# Altium PCB Motor Driver.PcbDoc
Units mil, origin at the board's own origin, x right, y up, seen from the top; angles counter-clockwise.
Board outline 1620 x 1620 mil, 2 copper layers (Top Layer, Bottom Layer); 66 components, 61 nets, 246 pads, 97 vias.
Unrouted connection lines stored in the file: 11.
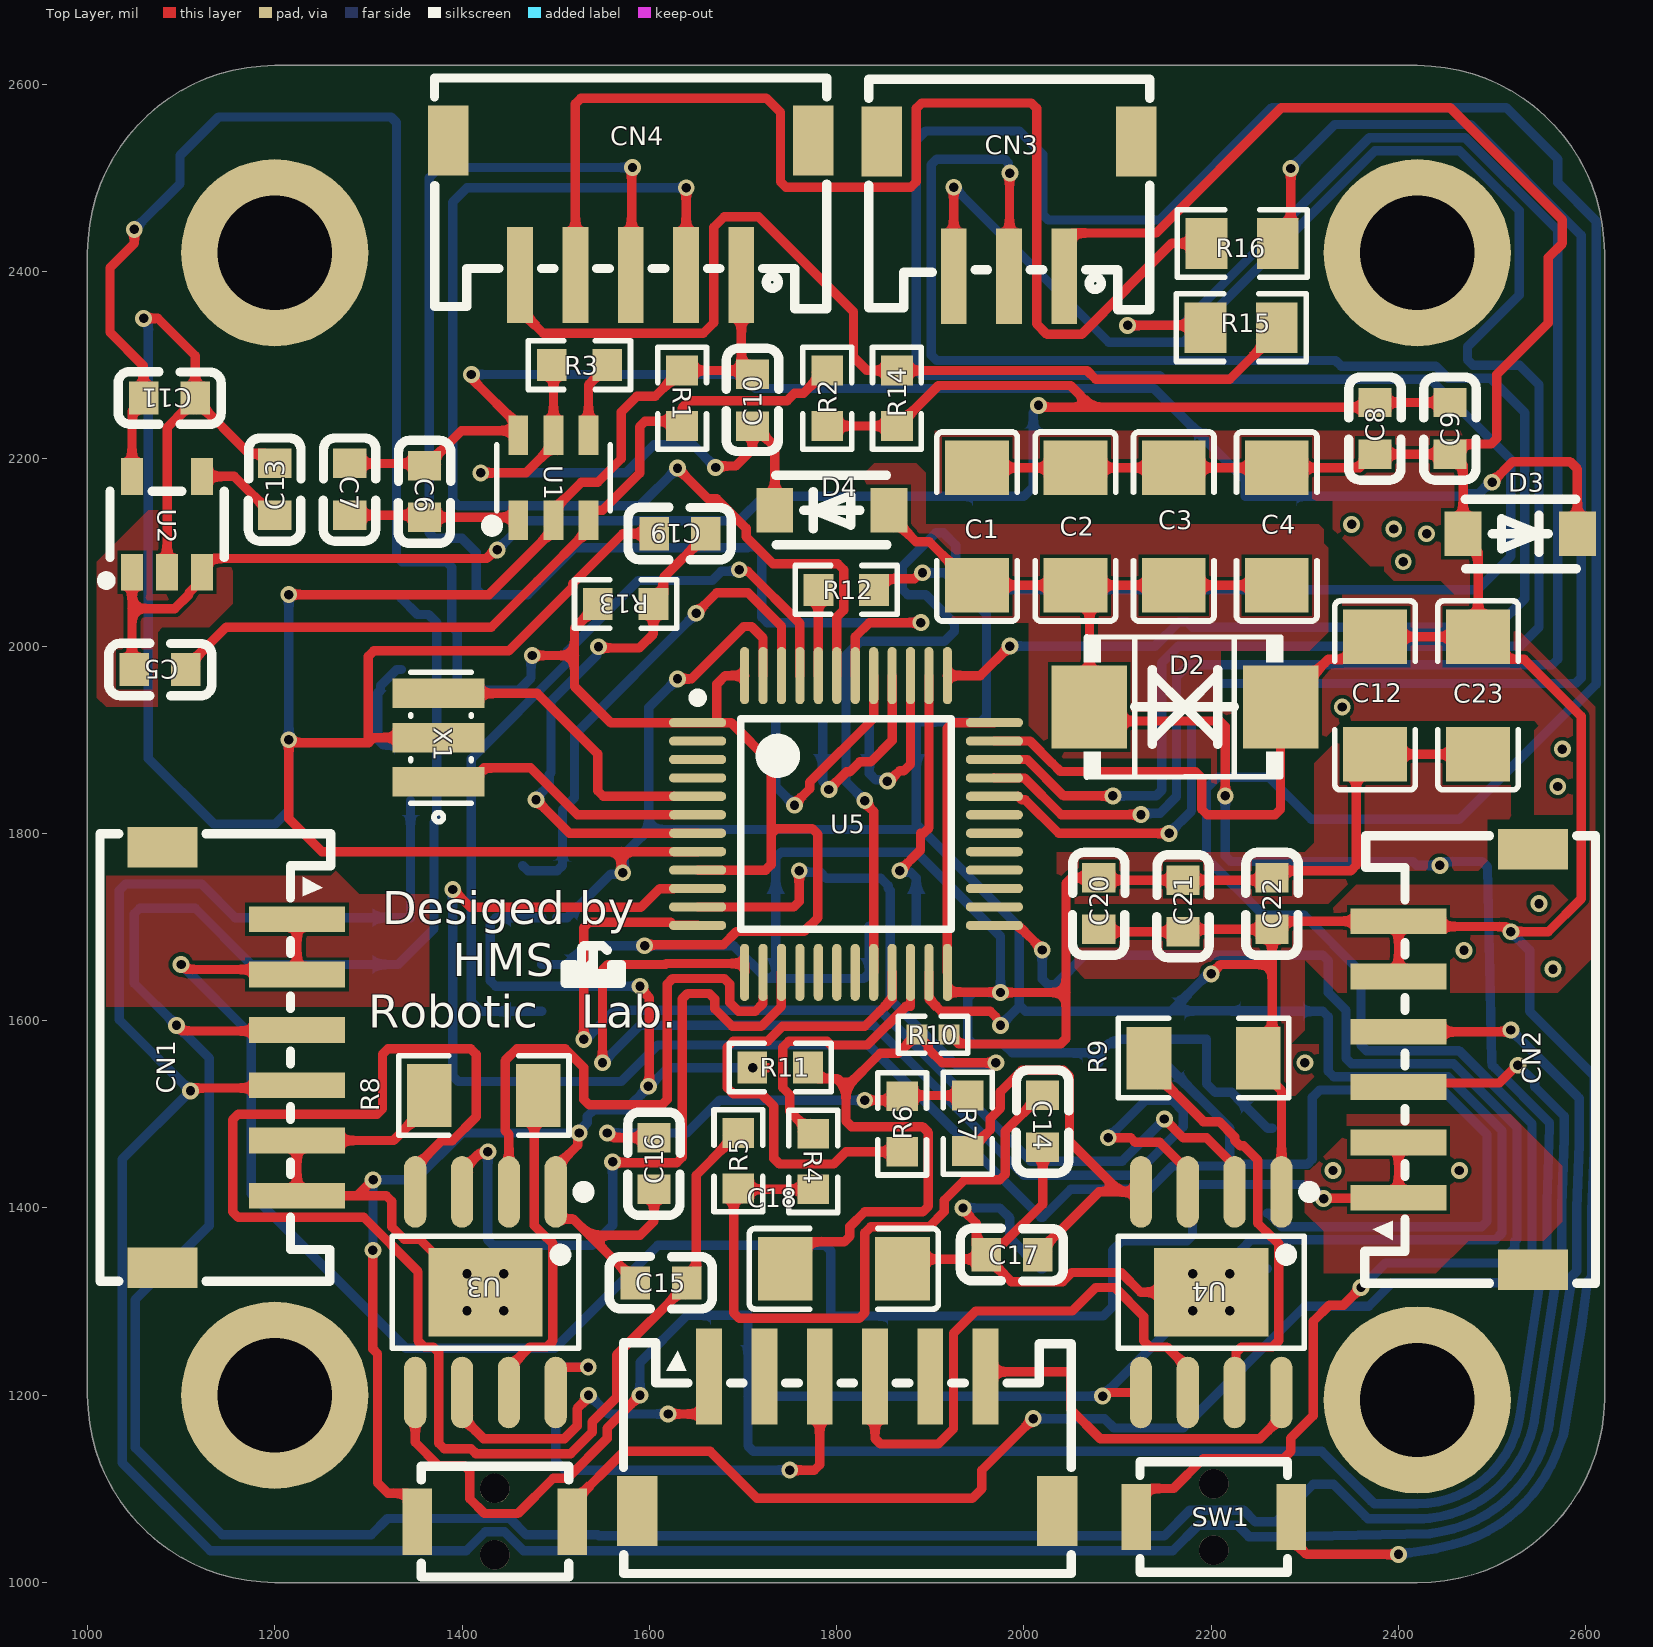
[diagram p0: Top Layer view]
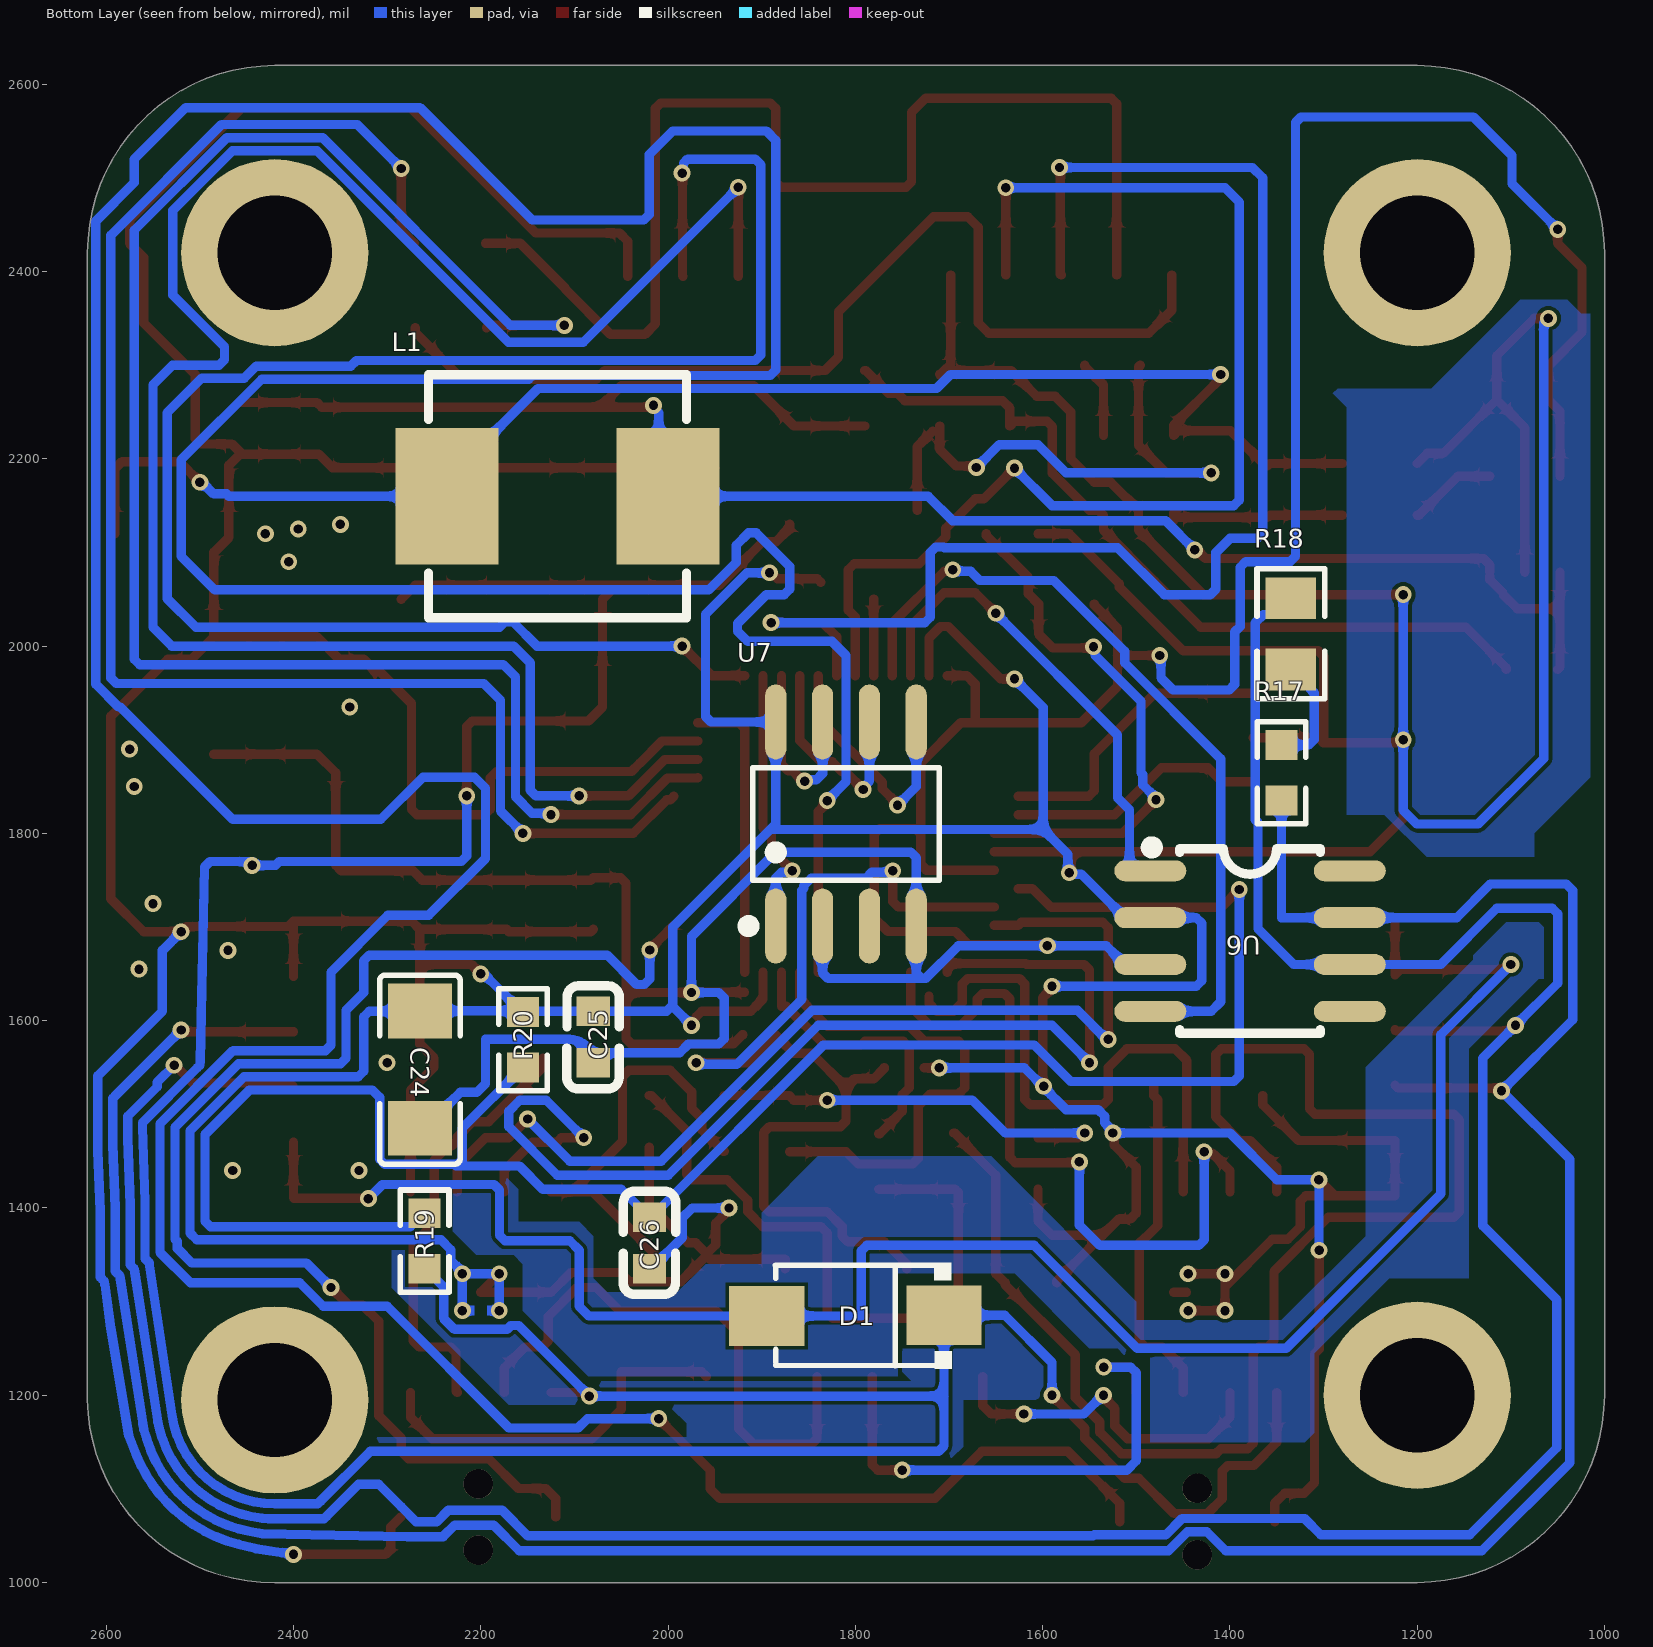
[diagram p1: Bottom Layer view, seen from below]

## Layer stack, top to bottom
Top Solder: solder mask 0.4, Solder Resist, Dk 3.5
Top Layer: signal copper 1.4
Dielectric 1: dielectric 12.6, FR-4, Dk 4.8
Bottom Layer: signal copper 1.4
Bottom Solder: solder mask 0.4, Solder Resist, Dk 3.5

## Board outline
1200,1000 cw(c1200,1200) 1000,1200 1000,2420 cw(c1200,2420) 1200,2620 2420,2620 cw(c2420,2420) 2620,2420 2620,1195 cw(c2422.5,1197.5) 2420,1000

## Design rules (kind name [scope] priority, off if disabled: settings)
Clearance [All] p1: gap=4 ignorepadtopadclearanceinfootprint=FALSE
HoleSize [All] p1: absolutevalues=TRUE maxlimit=10000 minlimit=8 maxpercent=80.000 minpercent=20.000
MinimumSolderMaskSliver [All] p1: minsoldermaskwidth=1
PolygonConnect [All] p1: connectstyle=Relief reliefconductorwidth=10 reliefentries=4 polygonreliefangle="90 Angle" airgapwidth=10
RoutingVias [All] p1: holewidth=28 width=50 viastyle="Through Hole" minholewidth=28 minwidth=50 maxholewidth=28 maxwidth=50
SilkToSilkClearance [All] p1: silktosilkclearance=0
SilkToSolderMaskClearance [IsPad] p1: minsilkscreentomaskgap=0 clearancetoexposedcopper=TRUE
SolderMaskExpansion [All] p1: expansion=4 istentingtop=FALSE
Width [All] p1: maxlimit=10 minlimit=10 preferedwidth=10
26 further rules are at their usual default settings.

## Classes and differential pairs
component class Port: C23 CN1 CN2 CN3 CN4 R14 R15 R16 R17 R18 SW1 U6
component class MCU: C19 C20 C21 C22 R12 R13 U5 X1
component class Interface: C24 C26 R19 R20 U7
component class Drive: C14 C15 C16 C17 C18 R4 R5 R6 R7 R8 R10 U3
component class Power: C1 C2 C3 C4 C5 C6 C7 C8 C9 C10 C11 C12 C13 D1 D2 D3 D4 L1 R1 R2 R3 U1 U2

## Components (designator, comment, footprint, x,y, rotation, side; value= is the part's Value field where it differs from the comment)
C1 "100uF" C1206 1950,2127.7 r90 top
C2 "100uF" C1206 2055,2127.7 r90 top
C3 "100uF" C1206 2160,2127.7 r90 top
C4 "100uF" C1206 2270,2127.7 r90 top
C5 "100pF" C0603 1077.44,1975 r180 top
C6 "100nF" C0603 1360,2165 r90 top
C7 "100nF" C0603 1280,2167.45 r90 top
C8 "100nF" C0603 2375,2232.55 r90 top
C9 "100nF" C0603 2455,2232.55 r90 top
C10 "100nF" C0603 1710,2262.55 r270 top
C11 "100nF" C0603 1087.44,2265 r180 top
C12 "10uF" C1206 2375,1947.3 r270 top
C13 "10nF" C0603 1200,2167.45 r90 top
C14 "100nF" C0603 2020,1492.56 r90 top
C15 "100nF" C0603 1612.56,1320 r0 top
C16 "100nF" C0603 1605,1447.56 r90 top
C17 "100nF" C0603 1987.44,1350 r0 top
C18 "10uF" C1206 1807.7,1335 r180 top
C19 "100nF" C0603 1632.56,2120 r0 top
C20 "100nF" C0603 2080,1725 r90 top
C21 "100nF" C0603 2170,1722.56 r90 top
C22 "100nF" C0603 2265,1725 r90 top
C23 "10uF" C1206 2485,1947.3 r90 top
C24 "10uF" C1206 2265,1547.7 r90 bottom
C25 "100nF" C0603 2080,1582.44 r90 bottom
C26 "100nF" C0603 2020,1362.56 r270 bottom
CN1 "HC-ZH-6PWT" CONN-SMD_6P-P1.50_HCTL_HC-ZH-6PWT 1151.85,1560.59 r270 top
CN2 "HC-ZH-6PWT" CONN-SMD_6P-P1.50_HCTL_HC-ZH-6PWT 2471.85,1558.58 r90 top
CN3 "HC-ZH-3PWT" CONN-SMD_HC-ZH-3PWT 1984.06,2466.85 r180 top
CN4 "HC-ZH-5PWT" CONN-SMD_5P-P1.50_HCTL_HC-ZH-5PWT 1580.12,2468.15 r180 top
CN5 "HC-ZH-6PWT" CONN-SMD_6P-P1.50_HCTL_HC-ZH-6PWT 1811.42,1148.15 r0 top
D1 "SS54" SMA_L4.3-W2.6-LS5.0-RD 1800,1285 r0 bottom
D2 "SMBJ28CA" SMB_L4.6-W3.6-LS5.3-BI 2172.02,1935 r180 top
D3 "1N5819W" SOD-123F_L2.8-W1.8-LS3.7-RD 2530,2120 r180 top
D4 "1N5819W" SOD-123F_L2.8-W1.8-LS3.7-RD 1795,2145 r0 top
L1 "6.8uH" IND-SMD_L7.0-W6.6 2118.1,2160 r180 bottom
R1 "1.8K" R0603 1635,2264.66 r270 top
R2 "10K" R0603 1790,2264.66 r270 top
R3 "1M" R0603 1525.35,2300 r180 top
R4 "1K" R0603 1775,1449.65 r270 top
R5 "1K" R0603 1695,1450.35 r90 top
R6 "1K" R0603 1870,1489.65 r90 top
R7 "1K" R0603 1940,1490.35 r270 top
R8 "0.1" R1206 1423.22,1520 r180 top
R9 "0.1" R1206 2191.78,1560 r0 top
R10 "NTCThermistor" R0402 1902.96,1585 r180 top
R11 "3.3K" R0603_NEW 1739.65,1550 r0 top
R12 "10K" R0603 1810.35,2060 r0 top
R13 "10K" R0603 1574.65,2045 r180 top
R14 "1.5K" R0603 1864.34,2264.66 r90 top
R15 "22Ω" R0805 2231.96,2340 r0 top
R16 "22Ω" R0805 2233.04,2430 r180 top
R17 "120" R0603 1345,1864.65 r90 bottom
R18 "0" R0805 1335,2013.04 r90 bottom
R19 "10K" R0603 2260,1364.65 r90 bottom
R20 "1K" R0603 2155,1579.65 r90 bottom
SW1 "K2-1807UA-A4DW-06" KEY-SMD_L4.0-W2.9-L 2202.68,1070 r180 top
SW2 "K2-1807UA-A4DW-06" KEY-SMD_L4.0-W2.9-L 1435,1065 r0 top
U1 "ME3116" SOT-23-6_L2.9-W1.6-P0.95-LS2.8-BL 1497.6,2179.76 r0 top
U2 "LP2992IM5-3.3/NOPB" SOT-23-5_L3.0-W1.7-P0.95-LS2.8-BR 1085,2130 r270 top
U3 "A4950ELJTR-T" SOIC-8_L4.9-W3.9-P1.27-LS6.0-BL-EP 1425,1310 r180 top
U4 "A4950ELJTR-T" SOIC-8_L4.9-W3.9-P1.27-LS6.0-BL-EP 2200,1310 r180 top
U5 "STM32F103CBT6" STM-LQFP48_L 1810,1810 r0 top
U6 "SN65HVD232DR" SOIC-8_L5.0-W4.0-P1.27-LS6.0-BL 1378.5,1685 r270 bottom
U7 "MT6816CT-ACD" SOP-8_L5.0-W4.0-P1.27-LS6.0-BL 1810,1810 r180 bottom
X1 "12MHz" CRYSTAL-SMD_3P-L3.2-W1.3-P1.2-BL 1375,1902.24 r90 top

## Footprints (in the part's own frame and the unit in brackets; to place one, negate y for a bottom-side part, rotate by r counter-clockwise, add the part's x,y. Pads: shape width x height; smd on the part's side, far side on the other; paste and mask are expansions set on the pad)
C0603 [mm]
  rect 0.8x0.9 smd: 1(-0.7,0) 2(0.7,0)
  silkscreen extent -1.41,-0.71 1.39,0.72
C1206 [mm]
  rect 1.485x1.728 smd: 1(-1.593,0) 2(1.593,0)
  silkscreen extent -2.56,-1.09 2.56,1.09
CONN-SMD_5P-P1.50_HCTL_HC-ZH-5PWT [mm]
  rect 0.7x2.6 smd: 1(-3,1.825) 2(-1.5,1.825) 3(0,1.825) 4(1.5,1.825) 5(3,1.825)
  rect 1.1x1.9 smd: 6(4.95,-1.825) 7(-4.95,-1.825)
  silkscreen extent -5.32,-3.52 5.32,2.74
CONN-SMD_6P-P1.50_HCTL_HC-ZH-6PWT [mm]
  rect 0.7x2.6 smd: 1(-3.75,1.825) 2(-2.25,1.825) 3(-0.75,1.825) 4(0.75,1.825) 5(2.25,1.825) 6(3.75,1.825)
  rect 1.1x1.9 smd: 7(-5.7,-1.825) 8(5.7,-1.825)
  silkscreen extent -6.07,-3.52 6.07,2.74
CONN-SMD_HC-ZH-3PWT [mm]
  rect 0.7x2.6 smd: 1(-1.5,1.825) 2(0,1.825) 3(1.5,1.825)
  rect 1.1x1.9 smd: 4(3.45,-1.825) 5(-3.45,-1.825)
  silkscreen extent -3.82,-3.52 3.8,2.74
CRYSTAL-SMD_3P-L3.2-W1.3-P1.2-BL [mm]
  rect 0.8x2.5 smd: 1(-1.2,0) 2(0,0) 3(1.2,0)
  silkscreen extent -2.29,-0.89 1.78,0.76
IND-SMD_L7.0-W6.6 [mm]
  rect 2.8x3.7 smd: 1(-3,0) 2(3,0)
  silkscreen extent -3.5,-3.3 3.5,3.3
KEY-SMD_L4.0-W2.9-L [mm]
  rect 0.8x1.8 smd: 1(-2.1,0) 2(2.1,0)
  round 0.8 hole 0.8 unplated: ""(0,0.9) ""(0,-0.9)
  silkscreen extent -2,-1.5 2,1.5
R0402 [mm]
  rect 0.566x0.54 smd: 1(-0.433,0) 2(0.433,0)
  silkscreen extent -0.94,-0.5 0.94,0.5
R0603 [mil]
  rect 31.75x34.02 smd: 1(-29.65,0) 2(29.66,0)
  silkscreen extent -55,-26 55,26
R0603_NEW [mil]
  rect 31.75x34.02 smd: 1(-29.65,0) 2(29.65,0)
  silkscreen extent -55,-26 55,26
R0805 [mil]
  rect 44.59x54.21 smd: 1(-38.04,0) 2(38.04,0)
  silkscreen extent -69,-36 69,36
R1206 [mil]
  rect 47.54x66.97 smd: 1(-58.22,0) 2(58.22,0)
  silkscreen extent -91,-42 91,42
SMA_L4.3-W2.6-LS5.0-RD [mm]
  rect 2.046x1.62 smd: 1(-2.404,-0.009) 2(2.404,0.009)
  silkscreen extent -2.61,-1.44 2.16,1.44
SMB_L4.6-W3.6-LS5.3-BI [mil]
  rect 80.61x88.23 smd: 1(-102.02,0) 2(102.02,0)
  silkscreen extent -105,-75 108,75
SOD-123F_L2.8-W1.8-LS3.7-RD [mm]
  rect 1x1.2 smd: 1(-1.55,0) 2(1.55,0)
  silkscreen extent -1.52,-0.93 1.49,0.95
SOIC-8_L4.9-W3.9-P1.27-LS6.0-BL-EP [mm]
  oval 0.602x1.941 smd: 1(-1.905,-2.72) 2(-0.635,-2.72) 3(0.635,-2.72) 4(1.905,-2.72) 5(1.905,2.72) 6(0.635,2.72) 7(-0.635,2.72) 8(-1.905,2.72)
  rect 3.098x2.41 smd: 9(0,0)
  silkscreen extent -2.81,-2.87 2.53,1.52
SOIC-8_L5.0-W4.0-P1.27-LS6.0-BL [mil]
  oval 22.38x76.78 smd: 1(-75,-106.5) 2(-25,-106.5) 3(25,-106.5) 4(75,-106.5) 5(75,106.5) 6(25,106.5) 7(-25,106.5) 8(-75,106.5)
  silkscreen extent -106,-111 98,75
SOP-8_L5.0-W4.0-P1.27-LS6.0-BL [mil]
  oval 22.6x80.14 smd: 1(-75,-108.97) 2(-25,-108.97) 3(25,-108.97) 4(75,-108.97) 5(75,108.97) 6(25,108.97) 7(-25,108.97) 8(-75,108.97)
  silkscreen extent -110,-115 99,60
SOT-23-5_L3.0-W1.7-P0.95-LS2.8-BR [mm]
  rect 1x0.6 smd: 1(1.3,-0.95) 2(1.3,0) 3(1.3,0.95) 4(-1.3,0.95) 5(-1.3,-0.95)
  silkscreen extent -0.9,-1.78 1.65,1.55
SOT-23-6_L2.9-W1.6-P0.95-LS2.8-BL [mm]
  rect 0.532x1.072 smd: 1(-0.95,-1.149) 2(0,-1.149) 3(0.95,-1.149) 4(0.95,1.149) 5(0,1.149) 6(-0.95,1.149)
  silkscreen extent -1.82,-1.45 1.54,0.89
STM-LQFP48_L [mm] "QFP, 48-Leads, Body 7x7mm, Pitch 0.5mm, IPC High Density"
  oval 1.55x0.25 smd: 1(-4.025,2.75) 2(-4.025,2.25) 3(-4.025,1.75) 4(-4.025,1.25) 5(-4.025,0.75) 6(-4.025,0.25) 7(-4.025,-0.25) 8(-4.025,-0.75) 9(-4.025,-1.25) 10(-4.025,-1.75) 11(-4.025,-2.25) 12(-4.025,-2.75) 25(4.025,-2.75) 26(4.025,-2.25) 27(4.025,-1.75) 28(4.025,-1.25) 29(4.025,-0.75) 30(4.025,-0.25) 31(4.025,0.25) 32(4.025,0.75) 33(4.025,1.25) 34(4.025,1.75) 35(4.025,2.25) 36(4.025,2.75)
  oval 0.25x1.55 smd: 13(-2.75,-4.025) 14(-2.25,-4.025) 15(-1.75,-4.025) 16(-1.25,-4.025) 17(-0.75,-4.025) 18(-0.25,-4.025) 19(0.25,-4.025) 20(0.75,-4.025) 21(1.25,-4.025) 22(1.75,-4.025) 23(2.25,-4.025) 24(2.75,-4.025) 37(2.75,4.025) 38(2.25,4.025) 39(1.75,4.025) 40(1.25,4.025) 41(0.75,4.025) 42(0.25,4.025) 43(-0.25,4.025) 44(-0.75,4.025) 45(-1.25,4.025) 46(-1.75,4.025) 47(-2.25,4.025) 48(-2.75,4.025)
  silkscreen extent -4.15,-2.85 2.85,3.55, body extent -3.5,-3.5 3.5,3.5, height 1.6

## Part data
C1 C2 C3 C4: BOM_JLCPCB Part Class="Extended Part", BOM_Manufacturer="Murata Electronics", BOM_Manufacturer Part=GRM31CR61A107ME05L, BOM_Supplier=LCSC, BOM_Supplier Part=C312983, Contributor=LCSC, nameAlias=Capacitance, spicePre=C, spiceSymbolName=GRM31CR61A107ME05L
C5: BOM_JLCPCB Part Class="Extended Part", BOM_Manufacturer=YAGEO, BOM_Manufacturer Part=CC0603JRNPO9BN101, BOM_Supplier=LCSC, BOM_Supplier Part=C14665, nameAlias=Capacitance, spicePre=C, spiceSymbolName=CC0603JRNPO9BN101
C6 C7 C8 C9 C10 C11 C14 C15 C16 C17 C19 C20 C21 C22 C25 C26: BOM_JLCPCB Part Class="Extended Part", BOM_Manufacturer=SAMSUNG, BOM_Manufacturer Part=CL10B104KB8NNNC, BOM_Supplier=LCSC, BOM_Supplier Part=C1591, nameAlias=Capacitance, spicePre=C, spiceSymbolName=CL10B104KB8NNNC
C12 C18 C23 C24: BOM_JLCPCB Part Class="Basic Part", BOM_Manufacturer=SAMSUNG, BOM_Manufacturer Part=CL31A106KBHNNNE, BOM_Supplier=LCSC, BOM_Supplier Part=C13585, nameAlias=Capacitance, spicePre=C, spiceSymbolName=CL31A106KBHNNNE
C13: BOM_JLCPCB Part Class="Extended Part", BOM_Manufacturer=YAGEO, BOM_Manufacturer Part=CC0603KRX7R9BB103, BOM_Supplier=LCSC, BOM_Supplier Part=C100042, nameAlias=Capacitance, spicePre=C, spiceSymbolName=CC0603KRX7R9BB103
CN1 CN2 CN3 CN4 CN5: BOM_Manufacturer=HCTL(华灿天禄), BOM_Supplier=LCSC, Contributor=LCSC, spicePre=C
  CN1 CN2 CN5: BOM_Manufacturer Part=HC-ZH-6PWT, BOM_Supplier Part=C2845428, spiceSymbolName=HC-ZH-6PWT
  CN3: BOM_Manufacturer Part=HC-ZH-3PWT, BOM_Supplier Part=C2845425, spiceSymbolName=HC-ZH-3PWT
  CN4: BOM_Manufacturer Part=HC-ZH-5PWT, BOM_Supplier Part=C2845427, spiceSymbolName=HC-ZH-5PWT
D1: library part SS54_C727065, BOM_JLCPCB Part Class="Extended Part", BOM_Manufacturer=TWGMC, BOM_Manufacturer Part=SS54, BOM_Supplier=LCSC, BOM_Supplier Part=C727065, Contributor=LCSC, spicePre=D, spiceSymbolName=SS54_C727065
D2: library part SMBJ28CA_C908204, BOM_JLCPCB Part Class="Extended Part", BOM_Manufacturer=FUXINSEMI, BOM_Manufacturer Part=SMBJ28CA, BOM_Supplier=LCSC, BOM_Supplier Part=C908204, Contributor=LCSC, spicePre=D, spiceSymbolName=SMBJ28CA_C908204
D3 D4: BOM_JLCPCB Part Class="Extended Part", BOM_Manufacturer="Shandong Jingdao Microelectronics", BOM_Manufacturer Part=1N5819W, BOM_Supplier=LCSC, BOM_Supplier Part=C169540, Contributor=LCSC, spicePre=D, spiceSymbolName=1N5819W
L1: BOM_JLCPCB Part Class="Extended Part", BOM_Manufacturer=Sunlord, BOM_Manufacturer Part=MWSA0603S-6R8MT, BOM_Supplier=LCSC, BOM_Supplier Part=C408449, Contributor=LCSC, nameAlias=Inductance, spicePre=L, spiceSymbolName=MWSA0603S-6R8MT
R1: BOM_JLCPCB Part Class="Basic Part", BOM_Manufacturer=UniOhm, BOM_Manufacturer Part=0603WAF1801T5E, BOM_Supplier=LCSC, BOM_Supplier Part=C4177, nameAlias="Resistance (Ohms)", spicePre=R, spiceSymbolName=0603WAF1801T5E
R2 R12 R13 R19: BOM_JLCPCB Part Class="Basic Part", BOM_Manufacturer=UniOhm, BOM_Manufacturer Part=0603WAF1002T5E, BOM_Supplier=LCSC, BOM_Supplier Part=C25804, nameAlias="Resistance (Ohms)", spicePre=R, spiceSymbolName=0603WAF1002T5E
R3: BOM_JLCPCB Part Class="Basic Part", BOM_Manufacturer=UniOhm, BOM_Manufacturer Part=0603WAF1004T5E, BOM_Supplier=LCSC, BOM_Supplier Part=C22935, nameAlias="Resistance (Ohms)", spicePre=R, spiceSymbolName=0603WAF1004T5E
R4 R5 R6 R7 R20: BOM_JLCPCB Part Class="Basic Part", BOM_Manufacturer=UniOhm, BOM_Manufacturer Part=0603WAF1001T5E, BOM_Supplier=LCSC, BOM_Supplier Part=C21190, nameAlias="Resistance (Ohms)", spicePre=R, spiceSymbolName=0603WAF1001T5E
R8 R9: BOM_JLCPCB Part Class="Basic Part", BOM_Manufacturer=UniOhm, BOM_Manufacturer Part=1206W4F100LT5E, BOM_Supplier=LCSC, BOM_Supplier Part=C25334, nameAlias="Resistance (Ohms)", spicePre=R, spiceSymbolName=1206W4F100LT5E
R10: BOM_JLCPCB Part Class="Extended Part", BOM_Manufacturer=MuRata, BOM_Manufacturer Part=NCP15XH103F03RC, BOM_Supplier=LCSC, BOM_Supplier Part=C77131, nameAlias=Value, spicePre=R, spiceSymbolName=NCP15XH103F03RC
R11: BOM_JLCPCB Part Class="Basic Part", BOM_Manufacturer=UniOhm, BOM_Manufacturer Part=0603WAF3301T5E, BOM_Supplier=LCSC, BOM_Supplier Part=C22978, nameAlias="Resistance (Ohms)", spicePre=R, spiceSymbolName=0603WAF3301T5E
R14: BOM_JLCPCB Part Class="Basic Part", BOM_Manufacturer=UniOhm, BOM_Manufacturer Part=0603WAF1501T5E, BOM_Supplier=LCSC, BOM_Supplier Part=C22843, nameAlias="Resistance (Ohms)", spicePre=R, spiceSymbolName=0603WAF1501T5E
R15 R16: BOM_JLCPCB Part Class="Extended Part", BOM_Manufacturer=PANASONIC(松下), BOM_Manufacturer Part=ERJP06F22R0V, BOM_Supplier=LCSC, BOM_Supplier Part=C441970, Contributor=LCSC, nameAlias=Resistance, spicePre=R, spiceSymbolName=ERJP06F22R0V
R17: BOM_JLCPCB Part Class="Basic Part", BOM_Manufacturer=UniOhm, BOM_Manufacturer Part=0603WAF1200T5E, BOM_Supplier=LCSC, BOM_Supplier Part=C22787, nameAlias="Resistance (Ohms)", spicePre=R, spiceSymbolName=0603WAF1200T5E
R18: BOM_JLCPCB Part Class="Extended Part", BOM_Manufacturer=WTC, BOM_Manufacturer Part=WR08X000PTL, BOM_Supplier=LCSC, BOM_Supplier Part=C112378, nameAlias="Resistance (Ohms)", spicePre=R, spiceSymbolName=WR08X000PTL
SW1 SW2: BOM_JLCPCB Part Class="Extended Part", BOM_Manufacturer="Korean Hroparts Elec", BOM_Manufacturer Part=K2-1807UA-A4DW-06, BOM_Supplier=LCSC, BOM_Supplier Part=C502307, Contributor=LCSC, spicePre=S, spiceSymbolName=K2-1807UA-A4DW-06
U1: library part TP6841S6-A, BOM_JLCPCB Part Class="Extended Part", BOM_Manufacturer="TECH PUBLIC(台舟)", BOM_Manufacturer Part=TP6841S6-A, BOM_Supplier=LCSC, BOM_Supplier Part=C2844924, Contributor=LCSC, spicePre=U, spiceSymbolName=TP6841S6-A
U2 U6: BOM_JLCPCB Part Class="Extended Part", BOM_Manufacturer=TI, BOM_Supplier=LCSC, spicePre=U
  U2: BOM_Manufacturer Part=LP2992IM5-3.3/NOPB, BOM_Supplier Part=C129353, Contributor=LCSC, spiceSymbolName=LP2992IM5-3.3/NOPB
  U6: BOM_Manufacturer Part=SN65HVD232DR, BOM_Supplier Part=C30530, spiceSymbolName=SN65HVD232DR
U3 U4: BOM_JLCPCB Part Class="Extended Part", BOM_Manufacturer=ALLEGRO, BOM_Manufacturer Part=A4950ELJTR-T, BOM_Supplier=LCSC, BOM_Supplier Part=C82404, spicePre=U, spiceSymbolName=A4950ELJTR-T
U5: library part CMP-0237-00250-3, "ARM Cortex-M3 32-bit MCU, 128 KB Flash, 20 KB Internal RAM, 37 I/Os, 48-pin LQFP, -40 to 85 degC, Tray", I/Os (High Current)=37, Operating Frequency(F) (Processor speed) (MHz)=72, Supply Voltage(Vcc) min (V)=2, A/D Converter="2x12-bit (10 Channel)", ComponentLink1Description="Manufacturer URL", ComponentLink1URL=http://www.st.com/web/en/home.html, ComponentLink2Description=Datasheet, ComponentLink2URL=http://www.st.com/st-web-ui/static/active/en/resource/technical/document/datasheet/CD00161566.pdf, ComponentLink3Description="Package Specification", ComponentLink3URL=http://www.st.com/st-web-ui/static/active/en/resource/technical/document/datasheet/DM00058181.pdf, Core="ARM Cortex-M3", DatasheetVersion="Rev. 16", FLASH Size (Prog) (kB)=128, Internal RAM Size (kB)=20, Mounting Technology="Surface Mount", PackageDescription="48-Pin Low Profile Quad Flat Package, 7 x 7 mm Body, 0.5 mm Pitch", PackageReference=LQFP48, PackageVersion="Rev. 6, 06/2013", Packing=Tray, PartNumber=STM32F103CBT6
U7: BOM_JLCPCB Part Class="Extended Part", BOM_Manufacturer="Magn Tek", BOM_Manufacturer Part=MT6816CT-ACD, BOM_Supplier=LCSC, BOM_Supplier Part=C879560, Contributor=LCSC, spicePre=U, spiceSymbolName=MT6816CT-ACD
X1: BOM_JLCPCB Part Class="Extended Part", BOM_Manufacturer=muRata(村田), BOM_Manufacturer Part=CSTNE12M0G52A000R0, BOM_Supplier=LCSC, BOM_Supplier Part=C907957, Contributor=LCSC, nameAlias=Frequency, spicePre=X, spiceSymbolName=CSTNE12M0G52A000R0

## Free pads (board coordinates)
  round 200 hole 122.05: GND(1200,1200) GND(1200,2420) GND(2420,1195) GND(2420,2420)

## Via types
v1: diameter 18, hole 10, Top Layer to Bottom Layer, 97 vias

## Nets (pads, with @x,y where several pads share a name; then routed paths per layer and width w, separated by ;. In a path a pad name is that pad's centre, name@x,y a point inside that pad or via, vN(x,y) a via of type N, cw(c..) or ccw(c..) an arc to the next point about the centre after c; other vN are vias at no path point)
BUTTON_1: SW1.2 U5.25 | length 1448.5
  Top Layer w10: U5.25@1993.98,1701.65 2019.5,1676.13 v1(2019.5,1675.5) ; SW1.2 2120,1089.68 2130.75,1100.43 2159.85,1100.43 2191.59,1132.18 2277.18,1132.18 2285,1140 2285,1154.22 2309,1178.22 2309,1279 2326.23,1296.23 2341.23,1296.23 v1(2360,1315)
  Bottom Layer w10: v1(2019.5,1675.5) 2019.5,1644.5 2025.36,1638.64 2033.64,1638.64 2065,1670 2319.14,1670 2325,1664.14 2325,1630 2344,1611 2344,1559.86 2349.86,1554 2458.67,1554 2526.51,1486.16 2526.51,1366.66 2524,1364.15 2524,1356.63 2508.57,1341.19 2386.19,1341.19 v1(2360,1315)
BUTTON_2: SW2.2 U5.20 | length 6174.9
  Top Layer w10: SW2.2 1517.68,1084.68 1572.99,1140 1665,1140 1715,1090 1945,1090 1955,1100 1955,1120 v1(2010,1175) ; v1(1830,1835) 1830,1832.84 1839.53,1823.31 U5.20
  Bottom Layer w10: v1(1830,1835) 1810,1855 1810,1990 1825,2005 1915,2005 1925.86,2015.86 1925.86,2024.14 1895,2055 1875.86,2055 1870,2060.86 1870,2085 1905.86,2120.86 1914.14,2120.86 1927.23,2107.77 1927.23,2089.26 1956.49,2060 2484.14,2060 2520,2095.86 2520,2198.99 2433.99,2285 2148.73,2285 2144.73,2289 1890.86,2289 1885,2294.86 1885,2540 1895,2550 1995,2550 2020,2525 2020,2460.86 2025.86,2455 2145,2455 2265,2575 2515,2575 2570,2520 2570,2495 2611,2454 2611,1959.23 2586.77,1935 2585,1935 2465,1815 2306.72,1815 2261.72,1860 2206.72,1860 2195,1848.28 2195,1773.23 2255.73,1712.5 2299.27,1712.5 2360,1651.77 2360,1573.86 2365.86,1568 2464.47,1568 2542.51,1489.96 2542.51,1352.51 2510,1320 2393.28,1320 2368.28,1295 2300,1295 2170,1165 2096.08,1165 2086.08,1175 v1(2010,1175)
CAN_H: CN1.4 CN2.4 R17.1 U6.7 | length 3472.5
  Top Layer w10: v1(1110,1525) 1113.03,1528.03 1220.67,1528.03 CN1.4 ; CN2.4 2518.11,1588.11 v1(2520,1590)
  Bottom Layer w10: R17.1 1345,1710 U6.7 1157.9,1710 1122.04,1745.86 1040.86,1745.86 1034,1739 1034,1601 v1(1110,1525) 1037,1452 1037,1128 1131,1034 1404.44,1034 1424.75,1054.32 1445.26,1054.32 1465.57,1034 2159,1034 2186.32,1061.32 2227.91,1061.32 2240.23,1049 2278.46,1049 2433.25,1052 2446.28,1054.44 ccw(c2420,1195) 2556.67,1152.93 2559.9,1163.42 2560.82,1169.1 2585.1,1324.5 2585.61,1327.72 2587.91,1330.03 2590.51,1332.63 2590.51,1399.41 2590.52,1399.78 2593,1467.6 2593,1517 2590.07,1519.93 v1(2520,1590)
CAN_L: CN1.3 CN2.3 R18.2 U6.6 | length 3696.5
  Top Layer w10: v1(1095,1595) 1101,1589 1222.58,1589 CN1.3 ; CN2.3 2404.41,1533.47 2507.59,1533.47 2526.55,1552.43 v1(2527.43,1552.43)
  Bottom Layer w10: R18.2 1352.29,2033.79 1364.14,2033.79 1373.11,2024.83 1373.11,1814.67 1370,1811.56 1370,1698.09 1331.91,1660 U6.6 1175,1660 1115,1720 1055.86,1720 1050,1714.14 1050,1640 v1(1095,1595) 1130,1560 1130,1381.12 1051,1302.12 1051,1144 1144,1051 1302.98,1051 1320.3,1068.32 1451.05,1068.32 1468.37,1051 1544.89,1051 1545.89,1050 2150,1050 2177.32,1077.32 2234.54,1077.32 2246.86,1065 2269.14,1065 2284.96,1080.82 2309,1104.86 2330.54,1104.86 2364.47,1070.93 2367.39,1068 2426.63,1068 2433.22,1068.69 ccw(c2420,1195) 2543.61,1165.83 2544.82,1170.96 2569.41,1331.42 2569.91,1334.66 2572.23,1336.97 2574.51,1339.26 2574.51,1402.49 2574.52,1402.83 2577,1474.23 2577,1498 2545.51,1529.49 2545.51,1534.35 v1(2527.43,1552.43)
CAN_RX: U5.45 U6.4 | length 859.8
  Top Layer w10: v1(1696.07,2081.44) 1697.6,2079.91 1705.09,2079.91 1760.79,2024.21 U5.45
  Bottom Layer w10: U6.4 1420,1610 1410,1620 1410,1879.75 1512.41,1982.15 1512.41,1994.32 1588.09,2070 1667.07,2070 1676.98,2079.91 1694.54,2079.91 v1(1696.07,2081.44)
CAN_TX: U5.46 U6.1 | length 543.6
  Top Layer w10: v1(1650,2035) 1672.04,2057.04 1705.33,2057.04 1741.1,2021.27 U5.46
  Bottom Layer w10: U6.1@1464.67,1765.72 1470.39,1760 U6.1 1501.48,1760 1507.2,1765.72 1507.2,1825.28 1520,1838.07 1520,1905 v1(1650,2035)
DM: CN4.4 R16.2 | length 1303.1
  Top Layer w10: CN4.4 1521.06,2579.14 1526.92,2585 1725,2585 1740,2570 1740,2495.86 1745.86,2490 1879.14,2490 1885,2495.86 1885,2574.14 1890.86,2580 2007.72,2580 2013.58,2574.14 2013.58,2344.01 2024.77,2332.82 2061.45,2332.82 2109.58,2380.95 2109.58,2381.87 2157.71,2430 R16.2
DP: CN4.5 R14.2 R15.2 | length 1092.7
  Top Layer w10: CN4.5 1462.01,2358.9 1486.79,2334.12 1657.51,2334.12 1668.7,2345.31 1668.7,2447.29 1679.89,2458.48 1716.56,2458.48 1818.01,2357.04 1818.01,2308.63 1832.33,2294.31 2067.41,2294.31 2076.72,2285 2219.81,2285 2270,2335.19 R15.2
GND: C1.2 C2.2 C3.2 C4.2 C8.1 C9.1 C10.1 C11.1 C12.1 C13.2 C14.1 C15.1 C16.1 C17.1 C18.1 C19.1 C20.1 C21.1 C22.1 C23.2 C24.2 C25.2 C26.2 CN1.5 CN1.6 CN2.5 CN2.6 CN3.1 CN4.1 D2.1 D3.2 R1.1 R8.2 R9.2 R11.1 R12.2 R20.2 SW1.1 SW2.1 U1.2 U2.2 U3.1 U3.9 U4.1 U4.9 U5.8 U5.23 U5.35 U5.47 U6.2 U7.8 X1.2 | length 13650.3
  Top Layer w10: v1(1060,2350) 1075,2350 1115,2310 C11.1 C11.1@1115,2263.03 ; U2.2 1085,2233.03 C11.1@1115,2263.03 ; C13.2 1189.25,2205.75 1172.28,2205.75 C11.1@1115,2263.03 ; v1(1215,2055) 1428.7,2055 1497.6,2123.9 U1.2 1497.6,2145.16 1527.44,2175 1545,2175 1570,2200 1570,2250 1586.72,2266.72 1606.27,2266.72 1633.87,2294.31 R1.1 C10.1@1704.78,2294.31 ; v1(1304.77,1354.77) 1304.77,1249.38 1309.77,1244.38 1309.77,1106.52 1320.86,1095.43 1341.58,1095.43 1352.33,1084.68 SW2.1 ; v1(1305,1430) 1290,1415 1287.95,1412.95 ; R8.2 1365,1510.29 1326.72,1472.01 CN1.5 CN1.6 1287.95,1412.95 ; X1.2 1305.86,1902.24 1300.43,1896.82 ; v1(1444.68,1290.32) v1(1405.31,1290.32) 1405.31,1310 U3.9@1405.31,1316.15 ; v1(1444.68,1329.69) v1(1405.31,1329.69) U3.9@1405.31,1316.15 ; U3.9@1446.46,1310 U3.9@1460,1310 ; v1(1525,1480) 1523.47,1478.47 1523.47,1466.93 1500,1443.46 U3.1 1500,1394.46 1506.33,1388.13 1518.84,1388.13 1536.11,1370.86 ; v1(1571.53,1757.93) 1570,1759.46 1570,1780.47 ; C15.1 1585,1321.97 1536.11,1370.86 ; v1(1590,1636.75) 1590,1634.59 1600,1624.59 1600,1531 v1(1599,1530) ; C16.1 1605,1385.86 1590,1370.86 1536.11,1370.86 ; C19.1 1571.56,2120 1518.12,2066.56 1518.12,2063.12 1450,1995 1305.86,1995 1300,1989.14 1300,1897.24 1300.43,1896.82 ; v1(1630,1965) 1645,1965 1700.86,2020.86 1709.14,2020.86 1721.42,2008.58 U5.47 ; U5.8 1570,1780.47 ; CN4.1 1698.23,2300.86 C10.1@1704.78,2294.31 ; C10.1@1709.2,2289.31 C10.1 1708.98,2290.11 C10.1@1704.78,2294.31 ; R11.1 v1(1710.4,1549.6) 1726.43,1549.6 ; R12.2@1836.93,2068.07 1840.88,2072.01 1883.13,2072.01 1889.48,2078.36 v1(1891.64,2078.36) ; C18.1@1875.05,1334.88 1875.05,1345.34 1955.23,1345.34 C17.1 ; U5.23 1898.58,1623.11 1911.67,1610.02 1964.14,1610.02 1970,1604.17 ; v1(1935,1400) 1935,1397.84 1949.14,1383.69 1949.14,1360.75 C17.1 ; C1.2 C2.2 C3.2 C4.2 2358.43,2190.39 2373.03,2205 C8.1 C9.1 ; U5.35 2006.42,1898.58 2030.11,1874.89 ; C14.1 2020,1404.02 1978.7,1362.72 1970.64,1362.72 1959.89,1351.97 C17.1 ; 2030.13,1874.89 2038.93,1866.08 2183.06,1866.08 2190,1859.14 2190,1825.86 2195.86,1820 2268.18,1820 2274.04,1825.86 D2.1 2274.04,1938.81 2309.34,1974.11 2313.15,1974.11 2324.8,1985.77 2350.77,1985.77 C12.1 C23.2 ; CN3.1 2043.11,2432.4 2051.89,2441.18 2141.22,2441.18 2275.04,2575 2455,2575 2575,2455 2575,2430 2560,2415 2560,2345 2505,2290 2505,2221.61 2499.14,2215.75 2465.75,2215.75 C9.1 ; C20.1 2082.45,1695 C21.1 2172.45,1697.44 C22.1 ; v1(2180.31,1329.69) U4.9 2124.78,1310 2103.78,1331 2051.05,1331 2041.34,1321.28 1986.64,1321.28 1959.89,1348.03 C17.1 ; v1(2200,1650) 2210,1660 2265,1660 ; U4.1 2275,1525.29 2250,1550.29 R9.2 2265,1575 2265,1660 ; SW1.1 2296.1,1059.25 2296.1,1035.86 2301.96,1030 v1(2400,1030) ; CN2.5 CN2.6 ; 1287.95,1412.95 1319.14,1412.95 1325,1407.1 1325,1379.8 1338.22,1366.58 1354.87,1366.58 U3.9@1405.31,1316.15 ; 1300.43,1896.82 1218.18,1896.82 cw(c1218.18,1900) v1(1215,1900) 1215,1815.86 1250.39,1780.47 1570,1780.47 ; 2265,1660 C22.1 ; C22.1 2273.78,1706.22 CN2.6 ; CN2.6 2405.61,1700.61 2514.39,1700.61 v1(2520,1695) 2560,1695 2595,1730 2595,1925 2534.23,1985.77 2509.23,1985.77 C23.2 ; C9.1 2456.97,2205 2468.98,2192.99 D3.2 2468.98,2116.06 2485,2100.04 C23.2
  Bottom Layer w10: v1(1060,2350) 1065,2345 1065,1880 1135,1810 1200.45,1810 1215,1824.55 v1(1215,1900) v1(1215,2055) ; v1(1304.77,1354.77) 1304.89,1354.89 1304.89,1429.89 v1(1305,1430) 1310,1430 1350,1430 1400,1480 v1(1525,1480) 1525,1482.16 1533.79,1490.95 1533.79,1497.93 1540.86,1505 1575,1505 1599,1529 v1(1599,1530) ; U6.2 1435.86,1710 1430,1704.14 1430,1642.61 1435.86,1636.75 v1(1590,1636.75) ; U6.2@1501.17,1710 1512.2,1710 1558.6,1756.4 1570,1756.4 v1(1571.53,1757.93) ; v1@1573.06,1759.46 1573.06,1777.81 1599.39,1804.14 ; v1@1600,1530 1619.6,1549.6 v1(1710.4,1549.6) ; v1(1630,1965) 1599.39,1934.39 1599.39,1804.14 ; v1(1891.64,2078.36) 1891.78,2078.22 1915.64,2078.22 1960,2033.86 1960,1924.82 1954.14,1918.97 U7.8 1885,1810 1890.86,1804.14 ; v1(1935,1400) 1974.14,1400 1985,1389.14 1985,1368.03 2018.03,1335 C26.2 ; v1(1975,1595) 1995.86,1615.86 2001.72,1610 C25.2 2154.31,1610 R20.2 ; 1995,1615 1995,1700 1890.86,1804.14 ; v1(2180.31,1290.32) v1(2180.31,1329.69) v1(2219.68,1329.69) ; v1(2200,1650) 2198.47,1648.47 2195.29,1648.47 2157.22,1610.39 C24.2 2265.39,1610 2319.14,1610 2325,1604.14 2325,1545.86 2330.86,1540 2452.87,1540 2510.51,1482.36 2510.51,1373.29 2503.22,1366 2242.56,1366 2231.99,1355.43 2231.99,1344.17 2219.68,1331.85 v1(2219.68,1329.69) ; v1(2219.68,1290.32) v1(2219.68,1329.69) ; v1(2400,1030) 2440.01,1036.13 2458.41,1040.71 ccw(c2420,1195) 2527.1,1077.48 ccw(c2420,1195) 2567.79,1136.35 2575.9,1156.79 2595.22,1271.66 2601.4,1317.99 2601.85,1321.34 2604.25,1323.74 2606.51,1326.01 2606.51,1396.28 2606.52,1396.66 2609,1460.98 2609,1541 2540,1610 2540,1675 v1(2520,1695) ; 1599.39,1804.14 1890.86,1804.14
  other v1: 2300,1555 2565,1655 2470,1675 2550,1725 2570,1850 2575,1890 2340,1935 2405,2090 2430,2120 2395,2125 2350,2130
IN_AM: U3.2 U5.14 | length 632.7
  Top Layer w10: U3.2 1450,1478.63 1445.96,1482.67 1445.96,1557.33 1458.63,1570 1510,1570 1530,1550 1530,1515.86 1535.86,1510 1613.14,1510 1619,1515.86 1619,1639.14 1624.86,1645 1679.95,1645 1685.81,1639.14 1685.81,1619.35 1695.14,1610.02 1713.01,1610.02 1721.34,1618.35 U5.14@1721.34,1626.02
IN_AP: U3.3 U5.15 | length 784.9
  Top Layer w10: U3.3 1400,1439.76 1418.71,1458.47 1426.02,1458.47 v1(1427.55,1460) ; v1(1560.77,1449.23) 1561.64,1448.36 1629.14,1448.36 1635,1454.22 1635,1623.14 1640.86,1629 1663.95,1629 1669.81,1623.14 1669.81,1612.72 1688.51,1594.02 1719.64,1594.02 1741.02,1615.41 1741.02,1651.46 U5.15
  Bottom Layer w10: v1(1427.55,1460) 1427.55,1365.86 1433.41,1360 1539.14,1360 1560.77,1381.62 v1(1560.77,1449.23)
IN_BM: U4.2 U5.12 | length 1086.2
  Top Layer w10: v1(1530,1580) 1530,1699.14 1535.86,1705 1622.83,1705 1626.1,1701.73 U5.12 ; v1(2150,1495) 2170,1475 2195,1475 2225,1445 U4.2
  Bottom Layer w10: v1(1530,1580) 1531.72,1580 1562.72,1611 1846.37,1611 2007.37,1450 2105,1450 v1(2150,1495)
IN_BP: U4.3 U5.13 | length 1227.8
  Top Layer w10: v1(1550,1555) 1550,1654.14 1555.86,1660 1617.23,1660 1618.23,1661 1701.65,1661 1701.73,1660.92 U5.13 ; v1(2090,1475) 2114,1475 2119,1470 2145,1470 2175,1440 U4.3
  Bottom Layer w10: v1(1550,1555) 1590,1595 1839.75,1595 1999.75,1435 2118.28,1435 2170,1486.72 2170,1503.28 2158.28,1515 2130,1515 v1(2090,1475)
IN_PWM_A: R4.1 U5.22 | length 300.5
  Top Layer w10: R4.1 1773.87,1479.31 1750,1503.18 1750,1520.87 1742.43,1528.44 1742.43,1562.01 1742.43,1563.24 1742.43,1571.56 1748.88,1578.01 1757.21,1578.01 1771.51,1578.01 1789.74,1578.01 1793.75,1574 1832.73,1574 1873.95,1615.22 1878.82,1615.22 1878.82,1651.46 U5.22
IN_PWM_B: R6.1 U5.21 | length 527.8
  Top Layer w10: U5.21 1859.21,1623.11 1846.12,1610.02 1845.95,1610.02 1829.94,1594.01 1750.58,1594.01 1742.25,1594.01 1726.25,1578.01 1689.57,1578.01 1683.12,1571.56 1683.12,1528.44 1689.84,1521.72 1719.88,1521.72 1733,1508.6 1733,1452.73 1738.86,1446.88 1796.88,1446.88 1810,1460 R6.1
MT6816_CS: U5.38 U7.1 | length 295.3
  Top Layer w10: v1(1867.43,1760) 1889.53,1782.1 1889.53,1800 1892.72,1800 1898.58,1805.86 U5.38
  Bottom Layer w10: v1(1867.43,1760) 1868.96,1758.47 1878.88,1758.47 1885,1752.35 U7.1
NetC5_1: C5.1 R1.2 R2.1 U1.3 | length 872
  Top Layer w10: C5.1 1105,1976.97 1148.03,2020 1431.1,2020 1480.31,2069.21 1535,2123.9 1535,2139.53 1540.47,2145 1550,2145 1589.56,2184.56 1589.56,2234.14 1595.42,2240 1630,2240 R1.2 1635,2254.14 1642.93,2262.07 1747.07,2262.07 1755,2270 1764.56,2270 1788.87,2294.31 R2.1
NetC6_1: C6.1 C7.1 U1.1 | length 197.9
  Top Layer w10: C7.1 1357.56,2139.89 C6.1 1457.28,2137.45 U1.1 1460.2,2142.23 U1.1@1454.72,2147.71
NetC6_2: C6.2 C7.2 D3.1 L1.1 U1.6 | length 1617.5
  Top Layer w10: C7.2 1357.56,2195 C6.2 1361.97,2192.55 1399.41,2230 1455.2,2230 U1.6 1460.2,2235.63 1411.53,2284.3 1411.53,2288.47 v1(1410,2290) ; v1(2500,2175) 2521.99,2196.99 2583.01,2196.99 2591.02,2188.98 D3.1
  Bottom Layer w10: v1(1410,2290) 1698.33,2290 1713.33,2275 2138.93,2275 2236.21,2177.72 L1.1 2468.99,2160 2471.49,2162.5 2485.34,2162.5 2497.84,2175 v1(2500,2175)
NetC10_2: C10.2 D4.1 R3.2 U1.5 | length 613
  Top Layer w10: v1(1420,2185) 1468.23,2185 1497.6,2214.37 U1.5 1497.6,2298.09 R3.2 ; v1(1670.77,2190.77) 1672.3,2192.3 1692.3,2192.3 1710,2210 C10.2 ; C10.2@1717.46,2229.51 1733.98,2212.99 D4.1
  Bottom Layer w10: v1(1420,2185) 1575,2185 1605,2215 1646.53,2215 v1(1670.77,2190.77)
NetC13_1: C13.1 U2.4 | length 94.7
  Top Layer w10: U2.4 1156.74,2181.18 1198.03,2139.89 C13.1
NetC14_2: C14.2 R4.2 R5.1 | length 730.3
  Top Layer w10: R4.2 1693.27,1420 1690,1416.73 1690,1288.04 1695.86,1282.18 1824.3,1282.18 1830.16,1288.04 1830.16,1373.57 1836.61,1380.02 1898.78,1380.02 1915,1396.24 1915,1408.28 1936.72,1430 1974.14,1430 1980,1435.86 1980,1482.08 2018.03,1520.11 C14.2
NetC16_2: C16.2 R6.2 R7.1 | length 457.1
  Top Layer w10: v1(1555,1480) 1557.16,1480 1562.05,1475.11 C16.2 C16.2@1602.56,1477.56 ; v1(1830,1515) 1865.69,1515 1870.69,1520 R7.1
  Bottom Layer w10: v1(1555,1480) 1640,1480 1675,1515 v1(1830,1515)
NetC19_2: C19.2 R13.1 U5.7 | length 574
  Top Layer w10: v1(1479,1835.86) 1514.7,1800.16 U5.7 ; v1(1545.69,1999.31) 1547.11,1997.89 1589.21,1997.89 1604.31,2012.99 R13.1 1615.19,2055.88 1615.19,2073.11 1660.11,2118.03 C19.2
  Bottom Layer w10: v1(1479,1835.86) 1479,1838.02 1493.01,1852.03 1493.01,1862.86 1495,1864.86 1495,1941.05 1544.15,1990.2 1544.15,1997.78 v1(1545.69,1999.31)
NetR3_1: R3.1 U1.4 | length 83.3
  Top Layer w10: U1.4 1535,2278.87 1555,2298.87 R3.1
NetR8_1: R8.1 U3.7 | length 367.3
  Top Layer w10: U3.7 1450,1229.25 1472.31,1251.56 1490.54,1251.56 1496.98,1258 1496.98,1362 1490.54,1368.44 1489.99,1368.44 1477.15,1381.28 1477.15,1515.71 R8.1 R8.1@1481.44,1529.71
NetR9_1: R9.1 U4.7 | length 465.7
  Top Layer w10: R9.1 2133.56,1550.29 2191.63,1492.22 2208.56,1492.22 2225,1475.78 2225,1472.17 2230.86,1466.31 2234.46,1466.31 2249.73,1451.05 2249.73,1383.7 2264.99,1368.44 2265.54,1368.44 2271.98,1362 2271.98,1258 2265.54,1251.56 2232.38,1251.56 2226.52,1245.7 2226.52,1204.42 U4.7
NetR12_1: R12.1 U5.44 | length 81.8
  Top Layer w10: U5.44 R12.1@1780.47,2050.22
NetR17_2: R17.2 R18.1 | length 125.4
  Bottom Layer w10: R18.1 1330.19,1975 1312.89,1957.71 1312.89,1952.89 1310,1950 1310,1900.17 1315.86,1894.31 R17.2
NetU5_5: U5.5 X1.3 | length 319.6
  Top Layer w10: X1.3 1480.39,1949.49 1545,1884.88 1545,1845.46 1550.86,1839.61 U5.5@1626.02,1839.61
NetU5_6: U5.6 X1.1 | length 278
  Top Layer w10: X1.1 1408.46,1855 1423.46,1870 1473.14,1870 1523.22,1819.92 1604.21,1819.92 U5.6@1626.02,1819.92
OLED_DC: U5.29
OLED_RES: U5.30
OUT_A+: CN5.1 U3.6 | length 374.1
  Top Layer w10: U3.6 1400,1176.54 1422.85,1153.69 1498.43,1153.69 1509.46,1153.69 1522.85,1167.07 1522.85,1185.69 1535,1197.84 v1(1535,1200) ; v1(1620,1180) 1655,1180 1663.78,1188.78 CN5.1
  Bottom Layer w10: v1(1535,1200) 1536.01,1200 1556.01,1180 v1(1620,1180)
OUT_A-: CN5.3 U3.8 | length 572
  Top Layer w10: U3.8 1500,1223.67 1506.33,1230 v1(1534.72,1230) ; v1(1750,1120) 1776.03,1120 1781.89,1125.86 CN5.3
  Bottom Layer w10: v1(1534.72,1230) 1505.86,1230 1500,1224.14 1500,1130 1510,1120 v1(1750,1120)
OUT_B+: CN5.4 U4.6 | length 608.8
  Top Layer w10: CN5.4 1840.94,1153.82 1846.8,1147.96 1908.48,1147.96 1924.78,1164.26 1924.78,1266.24 1948.54,1290 2051.72,1290 2076.72,1315 2097.16,1315 2128.02,1284.14 2128.02,1258 2134.46,1251.56 2152.69,1251.56 2175,1229.25 U4.6
OUT_B-: CN5.6 U4.8 | length 406.8
  Top Layer w10: CN5.6 1964.06,1225 2050,1225 2050,1185 2081.31,1153.69 2252.15,1153.69 2275,1176.54 U4.8
PA10: U5.31
PC13: U5.2
PC14: U5.3
PC15: U5.4
POWER_U: C26.1 R19.2 R20.1 U5.10 | length 2231.9
  Top Layer w10: v1(1390,1740) 1409,1721 1591,1721 1611.02,1741.02 U5.10@1626.02,1741.02
  Bottom Layer w10: v1(1390,1740) 1390,1540.86 1395.86,1535 1570,1535 1609,1574 1834.14,1574 C26.1@2018.03,1390.11 ; C26.1 2049.89,1420 2134.02,1420 2158.78,1444.77 2226.43,1444.77 2219.98,1451.21 2219.98,1485.02 R20.1 ; 2227.26,1446.77 2302.74,1446.77 2308.02,1452.04 2308.02,1518.02 2316,1526 2447.07,1526 2494.51,1478.56 2494.51,1385.86 2488.66,1380 2275.44,1380 2261.13,1394.31 R19.2
SPI1_MISO: U5.40 U7.6 | length 233.3
  Top Layer w10: v1(1791.73,1846.87) 1810.48,1865.62 1813.99,1865.62 1824.69,1876.32 1836.32,1876.32 1859.21,1899.21 U5.40
  Bottom Layer w10: U7.6 1785,1855.76 1791.73,1849.03 v1(1791.73,1846.87)
SPI1_MOSI: U5.41 U7.5 | length 270.7
  Top Layer w10: v1(1755,1830) 1755,1831.35 1771.29,1847.65 1771.29,1854.72 1839.53,1922.95 U5.41
  Bottom Layer w10: U7.5 1735,1850 v1(1755,1830)
SPI1_SCK: U5.39 U7.7 | length 204.4
  Top Layer w10: v1(1854.23,1855.77) 1856.4,1855.77 1867.46,1866.83 1871.83,1866.83 1878.9,1873.9 U5.39
  Bottom Layer w10: U7.7 1835,1863.9 1841.6,1857.3 1852.7,1857.3 v1(1854.23,1855.77)
SPI2_MISO: U5.27
SPI2_MOSI: U5.28
SPI2_SCK: U5.26
SWCLK: CN3.2 U5.37 | length 1925.2
  Top Layer w10: U5.37 1953.46,1968.46 v1(1985,2000) ; CN3.2 1984.53,2395.47 1984.53,2504.53 v1(1985,2505)
  Bottom Layer w10: v1(1985,2000) 2140,2000 2165.86,2025.86 2174.14,2025.86 2180,2020 2504.14,2020 2535,2050.86 2535,2249.14 2498.14,2286 2452.79,2286 2439.79,2299 2338.77,2299 2332.77,2305 1906.86,2305 1901,2310.86 1901,2514.14 1906.86,2520 1979.14,2520 1983.47,2515.67 1983.47,2506.53 v1(1985,2505)
SWDIO: CN3.3 U5.34 | length 2159.3
  Top Layer w10: CN3.3 v1(1925,2490) ; U5.34 1968.54,1878.82 2003.55,1878.82 2042.37,1840 v1(2095,1840)
  Bottom Layer w10: v1(1925,2490) 2090.5,2324.5 2170.35,2324.5 2374.85,2529 2465.15,2529 2529,2465.15 2529,2374.85 2473.75,2319.6 2473.75,2305.86 2479.61,2300 2529.14,2300 2550,2279.14 2550,2020 2530,2000 2165,2000 2147,1982 2147,1845.86 2141.14,1840 v1(2095,1840)
TEMP: C18.2 R10.2 R11.2 U5.11 | length 1154.9
  Top Layer w10: U5.11 1754.14,1721.42 1760,1727.28 v1(1760,1760) ; C18.2 1745,1339.78 1769.23,1364.02 1808.3,1364.02 1814.16,1369.87 1814.16,1380.2 1829.98,1396.02 1892.15,1396.02 1898.01,1401.87 1898.01,1480.43 1891.56,1486.88 1815.86,1486.88 1810,1492.73 1810,1528.65 ; R11.2 1769.31,1548.87 1780.19,1537.99 1800.65,1537.99 1810,1528.65 ; v1(1970,1555) 1943.95,1555 1912.68,1555 1897.87,1569.81 1897.87,1573.56 1886.42,1585 1885.41,1585 1865.64,1565.23 1846.58,1565.23 1810,1528.65
  Bottom Layer w10: v1(1760,1760) 1761.53,1758.47 1782.63,1758.47 1789,1752.1 1847.04,1752.1 1855,1744.14 1855,1741.34 1857.3,1739.04 1857.3,1622.7 1926.53,1553.47 1968.47,1553.47 v1(1970,1555)
UART1_RX: CN4.2 U5.43 | length 1270.4
  Top Layer w10: v1(1630,2190) 1662.85,2157.15 1671.98,2157.15 1703.29,2125.84 1703.29,2116.82 1732.11,2088.01 1801.12,2088.01 1807.57,2081.56 1807.57,2038.44 1800.16,2031.03 U5.43 ; CN4.2 1639.33,2396.45 1639.33,2489.33 v1(1639.48,2489.48)
  Bottom Layer w10: v1(1630,2190) 1590,2150 1395.86,2150 1390,2155.86 1390,2474.14 1405.34,2489.48 v1(1639.48,2489.48)
UART1_TX: CN4.3 U5.42 | length 1504.4
  Top Layer w10: CN4.3 1581.03,2397.21 1581.03,2510.21 v1(1581.95,2511.12) ; U5.42 1819.84,2009.84 1835,2025 v1(1890,2025)
  Bottom Layer w10: v1(1581.95,2511.12) 1376.12,2511.12 1365,2500 1365,2120.86 1370.86,2115 1400,2115 1415,2100 1415,2060.86 1420.86,2055 1470,2055 1520,2105 1705,2105 1705.86,2105.86 1714.14,2105.86 1720,2100 1720,2030.86 1725.86,2025 v1(1890,2025)
USB_DM: R16.1 U5.32 | length 1692.4
  Top Layer w10: U5.32@1993.98,1839.45 1997.66,1835.76 2001.35,1835.76 2037.12,1800 v1(2155,1800) ; R16.1 2285,2443.92 v1(2285,2510)
  Bottom Layer w10: v1(2155,1800) 2179,1824 2179,1942.14 2196.86,1960 2589.14,1960 2595,1965.86 2595,2438.75 2476.75,2557 2332,2557 v1(2285,2510)
USB_DP: R15.1 U5.33 | length 1887
  Top Layer w10: U5.33 1968.54,1859.13 2000.61,1859.13 2039.75,1820 v1(2125,1820) ; v1(2110.75,2342.5) 2191.42,2342.5 R15.1
  Bottom Layer w10: v1(2110.75,2342.5) 2168.55,2342.5 2369.05,2543 2470.95,2543 2570,2443.95 2570,1985.86 2564.14,1980 2175.86,1980 2163,1967.14 2163,1839.23 2145.3,1821.53 2126.53,1821.53 v1(2125,1820)
VCC: C1.1 C2.1 C3.1 C4.1 D1.1 D2.2 D4.2 R19.1 U3.5 U4.5 | length 4061.3
  Top Layer w10: U3.5 1350,1149.69 1374.69,1125 1402.4,1125 1408.26,1119.14 1408.26,1089.35 1423.93,1073.68 1459.62,1073.68 1497.37,1111.43 1512.47,1111.43 1554.85,1153.82 1554.85,1164.85 v1(1590,1200) ; D4.2@1870,2130 1870,2126.06 1884.68,2111.38 1898.84,2111.38 1945.22,2065 C1.1 C2.1 ; v1(2084.09,1199.09) 2086.25,1199.09 2090.06,1202.89 U4.5 ; v1(2215,1840) 2215,1914.14 2209.14,1920 2085,1920 D2.2 2070,2050 C2.1 ; C4.1@2285,2050 C4.1 C3.1 C2.1
  Bottom Layer w10: v1(1590,1200) 1590,1235 1640.37,1285.37 D1.1 1705.35,1258.48 1705.35,1199.09 ; v1@2215,1835 2215,1775.86 2220.86,1770 2415.14,1770 2419.28,1765.86 v1(2444.14,1765.86) ; R19.1 2258.87,1335 2239.68,1315.81 2239.68,1282.04 2227.96,1270.32 2172.03,1270.32 2167.82,1274.53 2159.53,1274.53 v1(2084.09,1199.09) 1705.35,1199.09 ; v1@2444.14,1770 2489.14,1770 2495,1764.14 2499.74,1556.45 2499.83,1552.44 2502.66,1549.61 2561.19,1491.08 2561.19,1486.6 2558.52,1406.08 2558.51,1405.75 2558.51,1345.89 2556.53,1343.91 2554.2,1341.58 2553.72,1338.32 2529.77,1178.55 cw(c2420,1195) 2420,1084 2374.02,1084 2371.09,1086.93 2318.02,1140 1711.21,1140 1705.35,1145.86 1705.35,1199.09
VCC_3V3: C11.2 C12.2 C20.2 C21.2 C22.2 C23.1 C24.1 C25.1 R10.1 R13.2 U2.5 U5.1 U5.9 U5.24 U5.36 U5.48 U6.3 U7.2 U7.4 | length 5092.2
  Top Layer w10: U2.5 1047.61,2250.75 1059.89,2263.03 C11.2 1059.89,2299.2 1024,2335.09 1024,2404 1050,2430 v1(1050,2445) ; v1(1475,1990) 1520,1990 ; R13.2 1545,2043.87 1520,2018.87 1520,1990 ; v1(1595,1680) 1596,1681 1678.91,1681 1693.05,1695.14 1765.14,1695.14 1780,1710 1780,1799.14 1774.14,1805 1735.86,1805 1730,1799.14 ; U5.9 1724.14,1760.79 1730,1766.65 1730,1799.14 ; U5.48 1681.09,1968.46 1672.13,1959.5 1672.13,1918.35 U5.1@1672.05,1918.27 ; U5.24 1918.27,1912.41 1924.13,1918.27 U5.36 ; U5.24@1918.35,1630.47 1974.53,1630.47 v1(1975,1630) 2045,1630 ; R10.1 1920.51,1585 1930.51,1575 2039.14,1575 2045,1580.86 2045,1630 ; C23.1 C12.2 2355,1864.61 2355,1825 2355,1765.86 2349.14,1760 2272.45,1760 C22.2 2262.55,1750.11 C21.2 2082.45,1750.11 C20.2 2050.86,1752.56 2045,1746.7 2045,1630 ; 1520,1990 1520,1956.9 1558.63,1918.27 U5.1@1672.05,1918.27 ; U5.1@1672.05,1918.27 1687.21,1918.27 1730,1875.48 1730,1799.14
  Bottom Layer w10: v1(1050,2445) 1098.83,2493.83 1098.83,2523.83 1140,2565 1324.14,2565 1330,2559.14 1330,2095.86 1335.86,2090 1383.25,2090 1389.11,2084.14 1389.11,2020.89 1395,2015 1395,1959 1400.86,1953.14 1460.77,1953.14 1473.63,1966 1473.63,1988.63 v1(1475,1990) ; U6.3 1512.2,1660 1532.2,1680 1690,1680 1725,1645 1729.14,1645 ; U7.2 1835,1650.86 1829.14,1645 1729.14,1645 ; C24.1 2260.22,1485 2221.84,1523.37 2204.25,1523.37 2195,1532.63 2195,1580 2105.11,1580 ccw(c2105.11,1554.89) C25.1 2069.25,1565.64 1987.65,1565.64 1978.28,1575 1945.86,1575 1940,1580.86 1940,1624.14 1945.86,1630 v1(1975,1630) 1975,1690 1885,1780 1740.86,1780 1735,1774.14 U7.4 1735,1650.86 1729.14,1645
VCC_5V: C5.2 C8.2 C9.2 L1.2 R2.2 R14.1 U2.1 U2.3 | length 1969.8
  Top Layer w10: U2.1 1047.6,2040 ; C5.2 1047.6,1977.29 1047.6,2040 ; U2.3@1122.4,2075 1122.4,2070.95 1108.44,2056.98 1108.44,2055.21 1093.23,2040 1047.6,2040 ; U2.3 1122.4,2086.69 1129.21,2093.51 1426.13,2093.51 1435.35,2102.73 v1(1437.52,2102.73) ; R2.2 R14.1 1865.47,2235 1908.78,2278.31 2049.75,2278.31 2073.06,2255 ; v1(2015.5,2257) 2017.03,2255.47 2022.69,2255.47 2023.16,2255 2073.06,2255 ; C9.2 C8.2 2369.89,2255 2073.06,2255
  Bottom Layer w10: v1(1437.52,2102.73) 1468.79,2134 1696.33,2134 1722.33,2160 L1.2 2010,2170 2010,2249.33 2015.5,2254.84 v1(2015.5,2257)
VCC_IN: CN1.1 CN1.2 CN2.1 CN2.2 D1.2 | length 2061.4
  Top Layer w10: v1(1100,1660) 1105.41,1654.59 1218.29,1654.59 CN1.2 CN1.1 ; v1(2320,1410) 2320.47,1410.47 2399.53,1410.47 CN2.1 CN2.2
  Bottom Layer w10: v1(1100,1660) 1175,1585 1175,1415 1340,1250 1499.09,1250 1609.09,1360 1787.96,1360 1793.82,1354.14 1793.82,1284.63 D1.2 2084.63,1284.63 2095,1295 2095,1355 2105,1365 2174.14,1365 2180,1370.86 2180,1419.14 2185.86,1425 2305,1425 v1(2320,1410)
VREF_A: C15.2 R5.2 U3.4 | length 1592.1
  Top Layer w10: U3.4 1350,1443.46 1378.17,1471.64 1389.45,1471.64 1415,1497.19 1415,1564.14 1409.14,1570 1320.86,1570 1315,1564.14 1315,1505.86 1309.14,1500 1160.86,1500 1155,1494.14 1155,1395.86 1160.86,1390 1295,1390 1353.02,1331.98 1353.02,1258 1359.46,1251.56 1369.14,1251.56 1375,1245.7 1375,1148.68 1380.86,1142.82 1409.62,1142.82 1414.75,1137.69 1516.09,1137.69 1538.85,1160.44 1538.85,1171.48 1565,1197.63 1565,1242.92 1640.11,1318.03 C15.2 1650,1329.89 1650,1435 1682.99,1467.99 1682.99,1469.12 1693.87,1480 R5.2
VREF_B: C17.2 R7.2 U4.4 | length 449
  Top Layer w10: R7.2 1941.13,1460.69 1964,1483.56 1964,1495.56 1974.87,1506.43 1974.87,1524 1997.73,1546.86 2042.27,1546.86 2048.72,1540.41 2048.72,1470.96 2102.57,1417.11 ; C17.2 2015,1351.97 2080.14,1417.11 2102.57,1417.11 ; U4.4 2102.57,1417.11
pads on no net: CN1.7 CN1.8 CN2.7 CN2.8 CN3.4 CN3.5 CN4.6 CN4.7 CN5.2 CN5.5 CN5.7 CN5.8 SW1. SW2. U5.16 U5.17 U5.18 U5.19 U6.5 U6.8 U7.3
copper on no net:
  other v1: 2330,1440 2465,1440

## Polygon pours and split planes (outlines as drawn)
no net on Top Layer "NONET_L01_P021" (solid, pour order 21): 2520,1910 2520,1820 2525,1815 2495,1815 2495,1770 2485,1760 2360,1760 2325,1725 2050,1725 2050,1585.86 2040,1575.86 2040,1565 1994.82,1565 1984.82,1575 1910,1575 1910,1595 1940,1595 1955,1580 1995,1580 2000,1585 1995,1590 1995,1620 1915,1620 1915,1675 1930,1675 1935,1680 1960,1680 1960,1645 1970,1655 2030,1655 2035,1660 2035,1780 2300,1780 2310,1790 2310,1875 2345,1910
no net on Top Layer "NONET_L01_P017" (solid, pour order 17): 2320,2110 2325,2105 2325,2015 2305,1995 2210,1995 2210,1935 2215,1935 2225,1925 2225,1820 2215,1810 2205,1820 2200,1820 2200,1880 2040,1880 2005,1915 2005,2025 1920,2025 1905,2040 1905,2095 1895,2095 1890,2100 1875,2100 1875,2105 1865,2115 1830,2115 1830,2185 1840,2195 1885,2195 1895,2185 1895,2130 2315,2130 2320,2125
no net on Top Layer "NONET_L01_P016" (solid, pour order 16): 1430,2080 1155,2080 1155,2045 1130,2020 1080,2020 1075,2015 1075,1935 1020,1935 1010,1945 1010,2090 1065,2145 1135,2145 1135,2135 1165,2105 1420,2105 1435,2120 1455,2100 1450,2100
no net on Top Layer "NONET_L01_P015" (solid, pour order 15): 1365,1735 1365,1615 1020,1615 1020,1755 1260,1755 1265,1760 1290,1735
no net on Top Layer "NONET_L01_P007" (solid, pour order 7): 2345,1500 2520,1500 2575,1445 2575,1385 2555,1365 2475,1365 2440,1330 2320,1330 2320,1375 2300,1395 2300,1440 2305,1440 2345,1480
no net on Top Layer "NONET_L01_P001" (solid, pour order 1): 2475,2230 1905,2230 1905,2160 1910,2155 2330,2155 2330,2125 2370,2085 2385,2085 2385,2080 2395,2070 2445,2070 2460,2055 2340,2055 2340,2020 2305,1985 2235,1985 2230,1980 2240,1970 2240,1890 2310,1890 2340,1920 2545,1920 2550,1915 2545,1910 2545,1820 2585,1820 2590,1815 2590,1730 2585,1725 2565,1745 2355,1745 2330,1720 2045,1720 2045,1665 2065,1645 2185,1645 2220,1610 2220,1530 2240,1510 2250,1520 2290,1520 2315,1545 2315,1575 2285,1575 2300,1590 2300,1665 2335,1630 2570,1630 2610,1670 2610,1935 2500,2045 2500,2205
no net on Bottom Layer "NONET_L02_P020" (solid, pour order 20): 1090,2370 1185,2275 1285,2275 1290,2270 1275,2255 1275,1820 1235,1820 1190,1775 1075,1775 1075,1800 1015,1860 1015,2355 1025,2355 1040,2370
no net on Bottom Layer "NONET_L02_P019" (solid, pour order 19): 1580,1240 1580,1195 1585,1190 1600,1190 1605,1195 1685,1195 1685,1145 1700,1130 2315,1130 2315,1115 2335,1115 2330,1120 2330,1140 2315,1155 1980,1155 1980,1170 2000,1190 2170,1190 2295,1315 2295,1355 2245,1355 2235,1345 2235,1290 2225,1280 2155,1280 2090,1215 1740,1215 1750,1225 1750,1320 1660,1320
no net on Bottom Layer "NONET_L02_P013" (solid, pour order 13): 2310,1435 2330,1415 2340,1415 2340,1400 2330,1390 2305,1390 2280,1415 2230,1415 2230,1375 2205,1350 2165,1350 2155,1340 2155,1290 2085,1220 1755,1220 1755,1330 1630,1330 1550,1250 1520,1250 1510,1240 1485,1240 1485,1150 1320,1150 1310,1160 1310,1245 1230,1325 1145,1325 1145,1570 1070,1645 1065,1645 1065,1700 1070,1705 1105,1705 1140,1670 1140,1665 1255,1550 1255,1370 1345,1280 1500,1280 1500,1300 1655,1455 1840,1455 1900,1395 1900,1340 1960,1340 1990,1310 2065,1310 2080,1325 2080,1370 2095,1385 2160,1385 2160,1420 2175,1435

## Silkscreen, mask and mechanical layers (free items; w line width, h text height)
Top Overlay:
  lines w10: 1520,1640 1520,1660 1510,1660 1510,1640 1570,1640 1570,1660 1560,1660 1560,1640 ; 1520,1650 1535,1650 1560,1650 ; 1540,1640 1540,1680 ; 1540,1662.5 1527.5,1650 1527.5,1677.5 1530,1680 1540,1680 ; 1555,1675 1550,1680 1540,1680
  text "Desiged by" at 1315,1691.32 h60
  text "HMS" at 1390,1635.72 h60
  text "Robotic   Lab." at 1300,1580.61 h60
Mechanical 1:
  lines w10: 1000,1360 1425,1360 ; 1385,1000 1385,1810 1000,1810 1810,1810 ; 1385,1065 1810,1065 2235,1065 ; 1465,1610 1530,1610 1800,1610 2080,1610 2155,1610 ; 1620,1505 1695,1505 1770,1505 1810,1505 ; 1710,1580 1810,1580 ; 1810,1000 1810,1810 ; 1810,1455 1810,1810 ; 1810,1510 1850,1510 ; 1810,1585 1850,1585 ; 1810,2620 1810,1810 ; 1845,1510 1920,1510 1995,1510 ; 2195,1470 2620,1470 ; 2620,1195 cw(c2422.5,1197.5) 2420,1000 1200,1000 cw(c1200,1200) 1000,1200 1000,2420 cw(c1200,2420) 1200,2620 2420,2620 cw(c2420,2420) 2620,2420 2620,1200 ; 2620,1810 1810,1810